# Altium PCB 调光灯1.pcbdoc
Units mil, origin at the board's own origin, x right, y up, seen from the top; angles counter-clockwise.
Board outline 2640 x 2100 mil, 2 copper layers (Top Layer, Bottom Layer); 9 components, 9 nets, 18 pads, 0 vias.
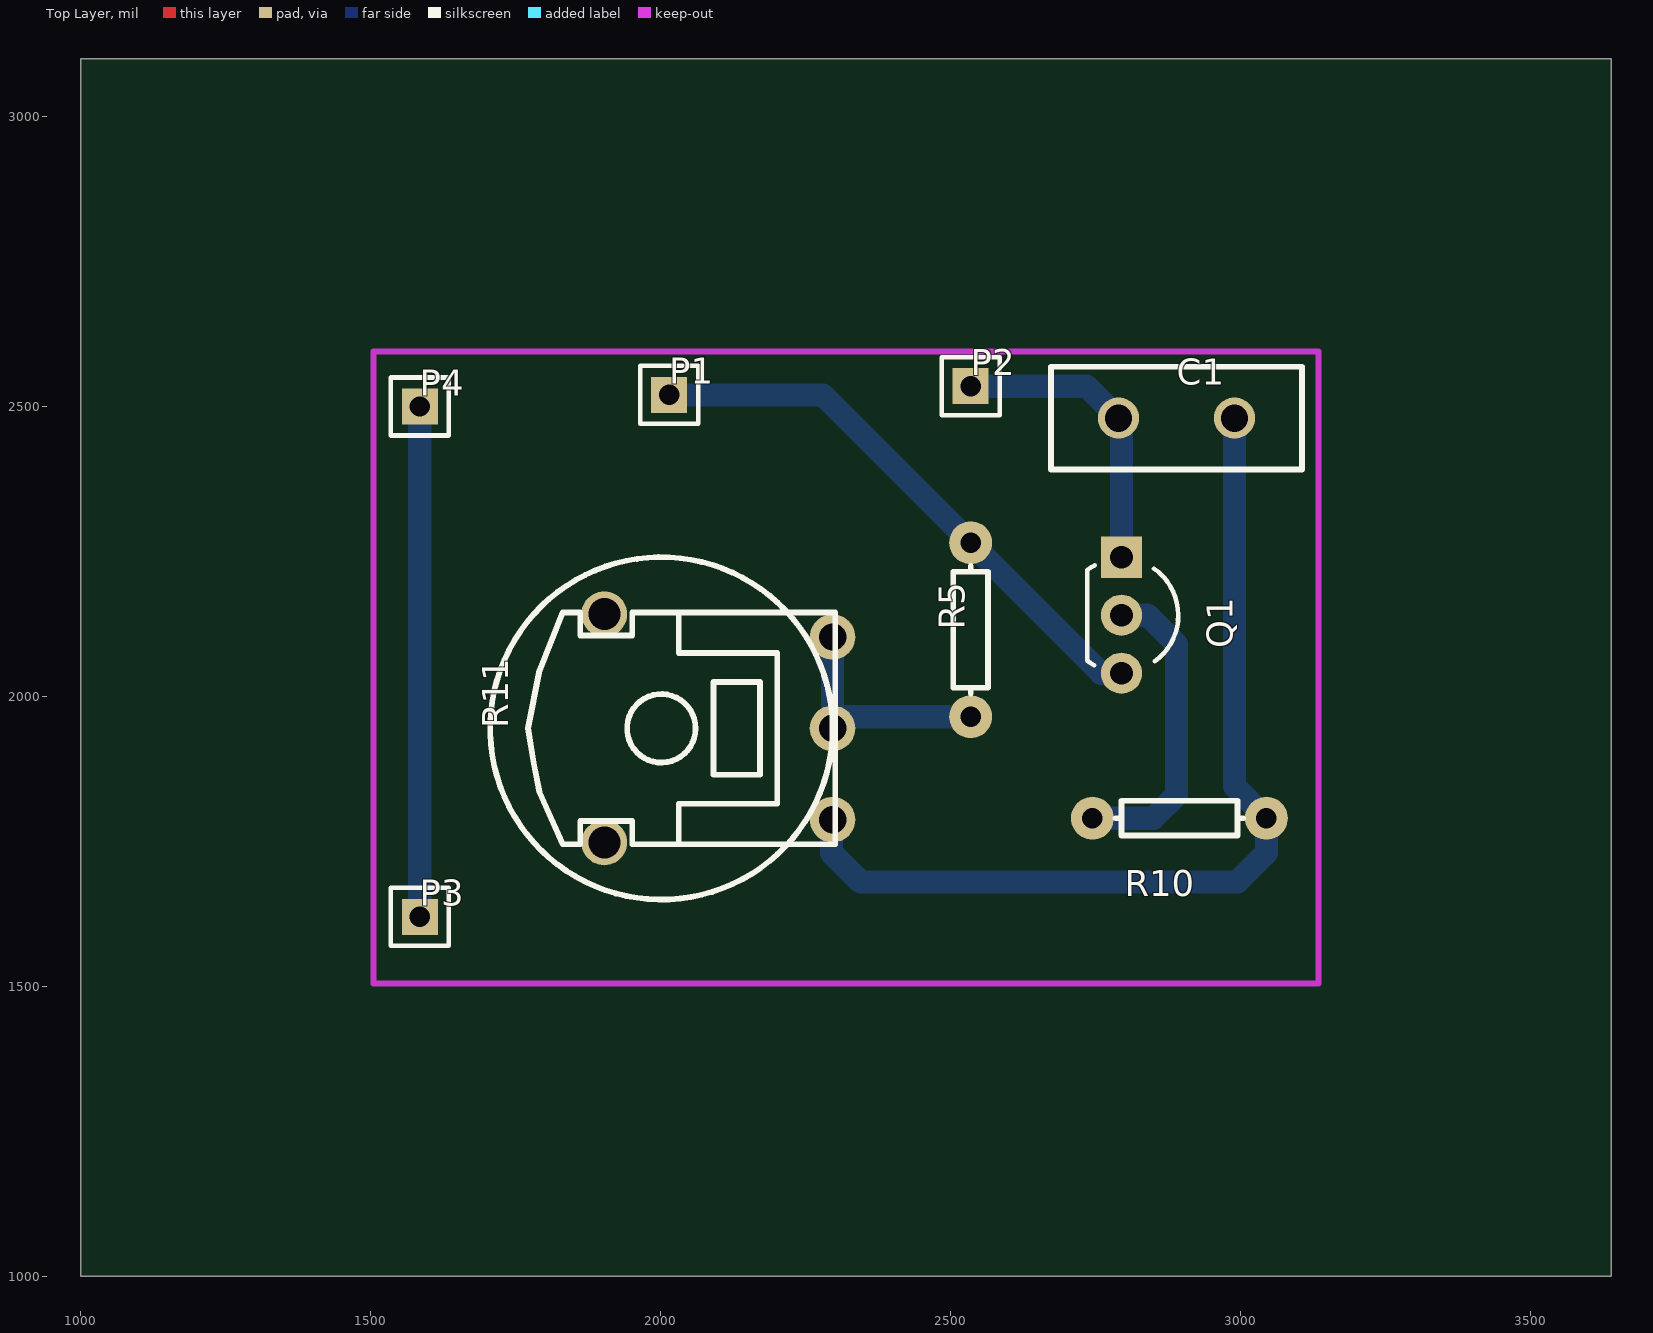
[diagram p0: Top Layer view]
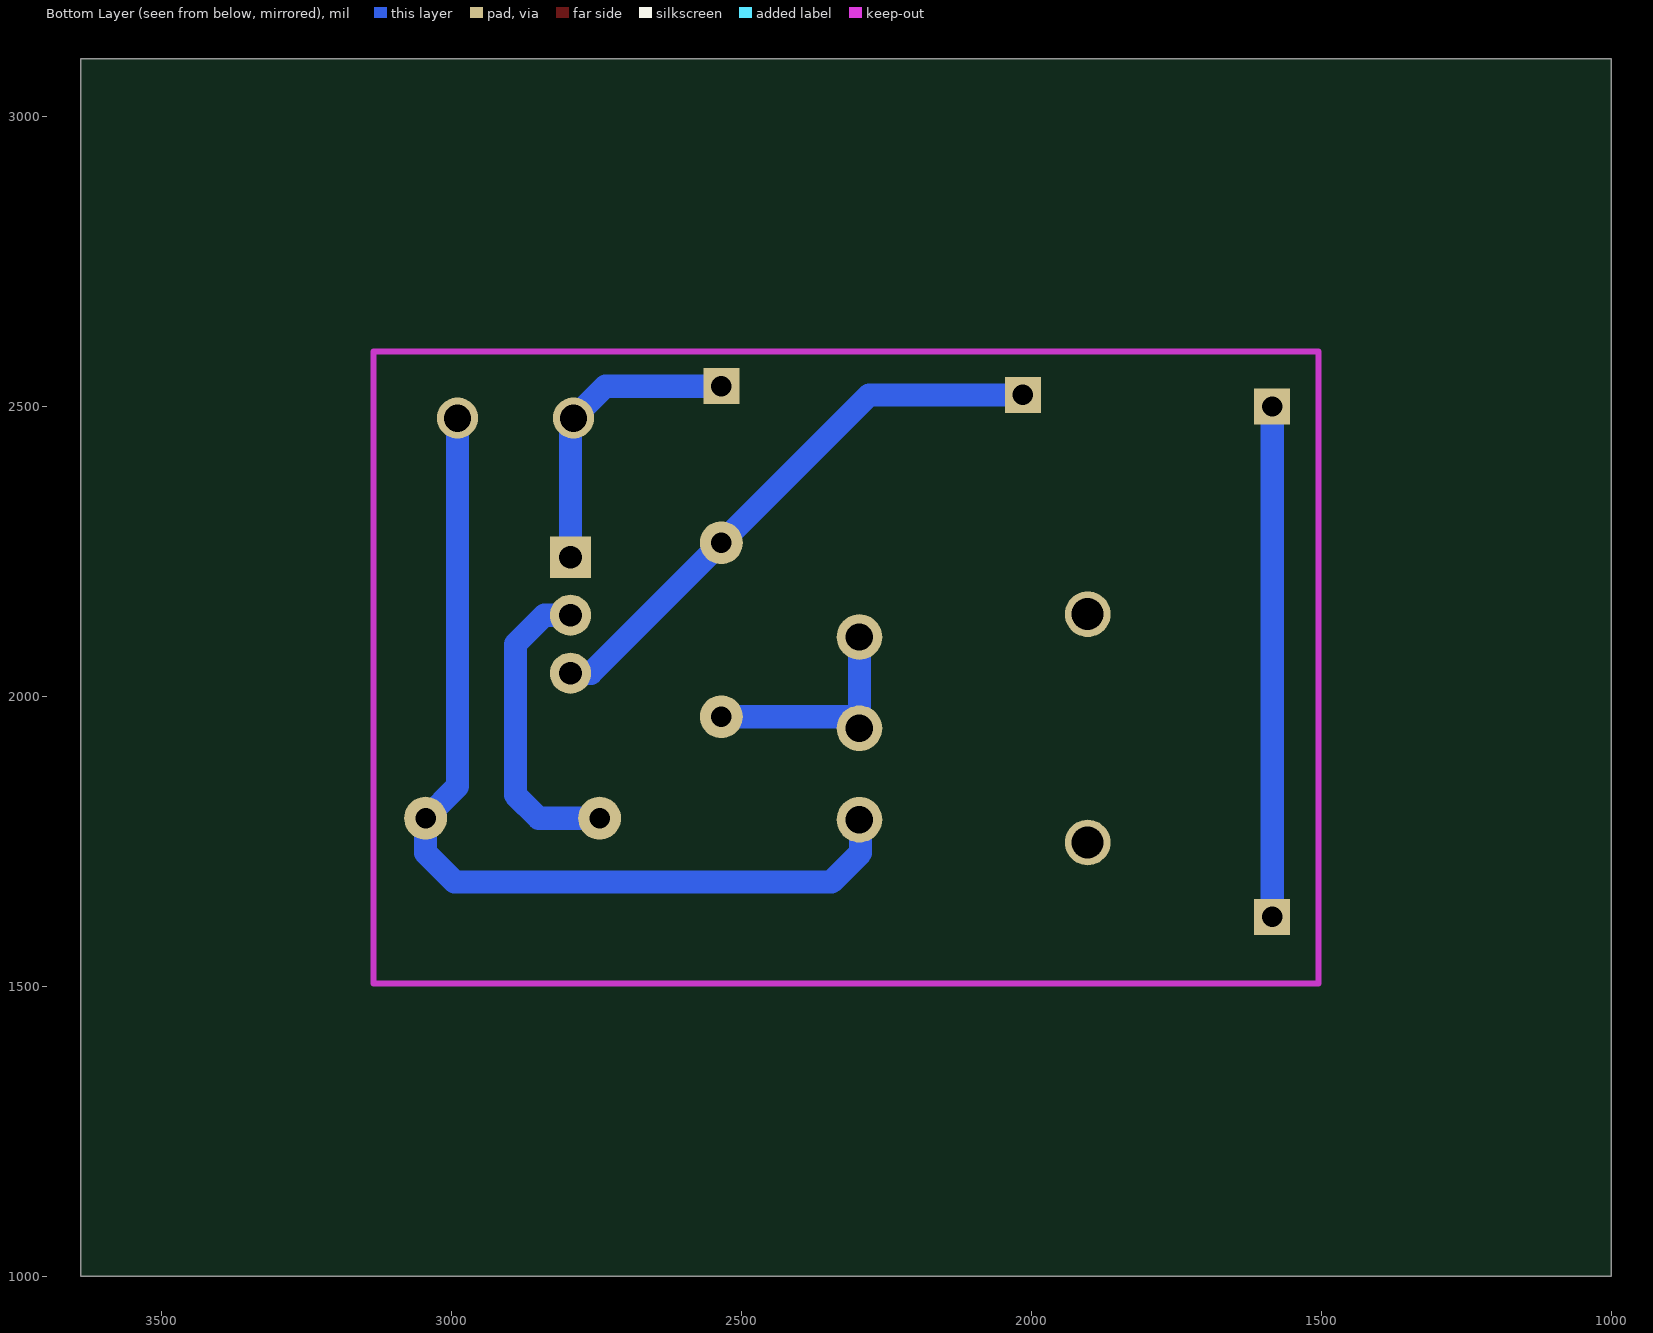
[diagram p1: Bottom Layer view, seen from below]

## Layer stack, top to bottom
Top Layer: signal copper (thickness not stored)
Dielectric: dielectric 12.6, FR-4, Dk 4.8
Bottom Layer: signal copper (thickness not stored)

## Board outline
3640,1000 1000,1000 1000,3100 3640,3100

## Components (designator, comment, footprint, x,y, rotation, side; value= is the part's Value field where it differs from the comment)
C1 "0.1uf" CAP-TH_L11.0-W4.5-P5.08-D1.2 2890,2480 r0 top
P1 "Header-Male-2.54_1x1" HDR-1X1/2.54 2015,2520 r0 top
P2 "Header-Male-2.54_1x1" HDR-1X1/2.54 2535,2535 r0 top
P3 "Header-Male-2.54_1x1" HDR-1X1/2.54 1585,1620 r0 top
P4 "Header-Male-2.54_1x1" HDR-1X1/2.54 1585,2500 r0 top
Q1 "S9013 H Copper feet Tube" TO-92_3PIN-L4.95-W3.94-PITCH2.54-L 2795,2140 r270 top
R5 "20k" AXIAL-0.3 2535,2115 r90 top
R10 "二极管" AXIAL-0.3 2895,1790 r180 top
R11 "WH160-1-B102(B1K)" WH160-1-B102 2100,1945 r90 top

## Footprints (in the part's own frame and the unit in brackets; to place one, negate y for a bottom-side part, rotate by r counter-clockwise, add the part's x,y. Pads: shape width x height; smd on the part's side, far side on the other; paste and mask are expansions set on the pad)
AXIAL-0.3 [mil]
  round 74 hole 35.4: 1(-150,0) 2(150,0)
  silkscreen extent -110,-30 110,30
CAP-TH_L11.0-W4.5-P5.08-D1.2 [mm]
  round 1.8 hole 1.2: 1(-2.54,0) 2(2.54,0)
  silkscreen extent -5.5,-2.25 5.5,2.25
HDR-1X1/2.54 [mil]
  rect 62x62 hole 35: 1(0,0)
  silkscreen extent -50,-50 50,50
TO-92_3PIN-L4.95-W3.94-PITCH2.54-L [mm]
  rect 1.8x1.8 hole 1: 1(-2.54,0)
  round 1.8 hole 1: 2(0,0) 3(2.54,0)
  silkscreen extent -2.19,-1.51 2.19,2.49
WH160-1-B102 [mm]
  round 2 hole 1.2: 1(-4.002,-5) 2(-0.001,-5) 3(3.999,-5)
  round 2 hole 1.4: 4(-5,5) 5(5,5)
  silkscreen extent -7.5,-5.12 7.5,10

## Nets (pads, with @x,y where several pads share a name; then routed paths per layer and width w, separated by ;. In a path a pad name is that pad's centre, name@x,y a point inside that pad or via, vN(x,y) a via of type N, cw(c..) or ccw(c..) an arc to the next point about the centre after c; other vN are vias at no path point)
C1_2: C1.2 R10.1 R11.1 | length 1622.5
  Bottom Layer w40: R11.1@2296.9,1787.5 2295,1785.6 2295,1730 2345,1680 2995,1680 3045,1730 R10.1 2990,1845 C1.2
null: 
P1_1: P1.1 Q1.3 R5.2 | length 978.8
  Bottom Layer w40: P1.1 2280,2520 R5.2 2760,2040 Q1.3
P2_1: C1.1 P2.1 Q1.1 | length 519.9
  Bottom Layer w40: P2.1 2735,2535 C1.1 2795,2475 Q1.1
P3_1: P3.1 P4.1 | length 880
  Bottom Layer w40: P3.1 P4.1
R5_1: R5.1 R11.2 R11.3 | length 404
  Bottom Layer w40: R11.3 R11.2 2316.9,1965 R5.1
R10_2: Q1.2 R10.2 | length 537.3
  Bottom Layer w40: R10.2 2850,1790 2890,1830 2890,2090 2840,2140 Q1.2
S$11: 
S$13: 
pads on no net: R11.4 R11.5

## Silkscreen, mask and mechanical layers (free items; w line width, h text height)
Document:
  lines w0.1: 2319,2049 2321,2051